# Altium PCB 100W_Inverter_V1_PCB.PcbDoc
Units mm, origin at the board's own origin, x right, y up, seen from the top; angles counter-clockwise.
Board outline 65.41 x 37.08 mm, 2 copper layers (Top Layer, Bottom Layer); 15 components, 15 nets, 48 pads, 0 vias.
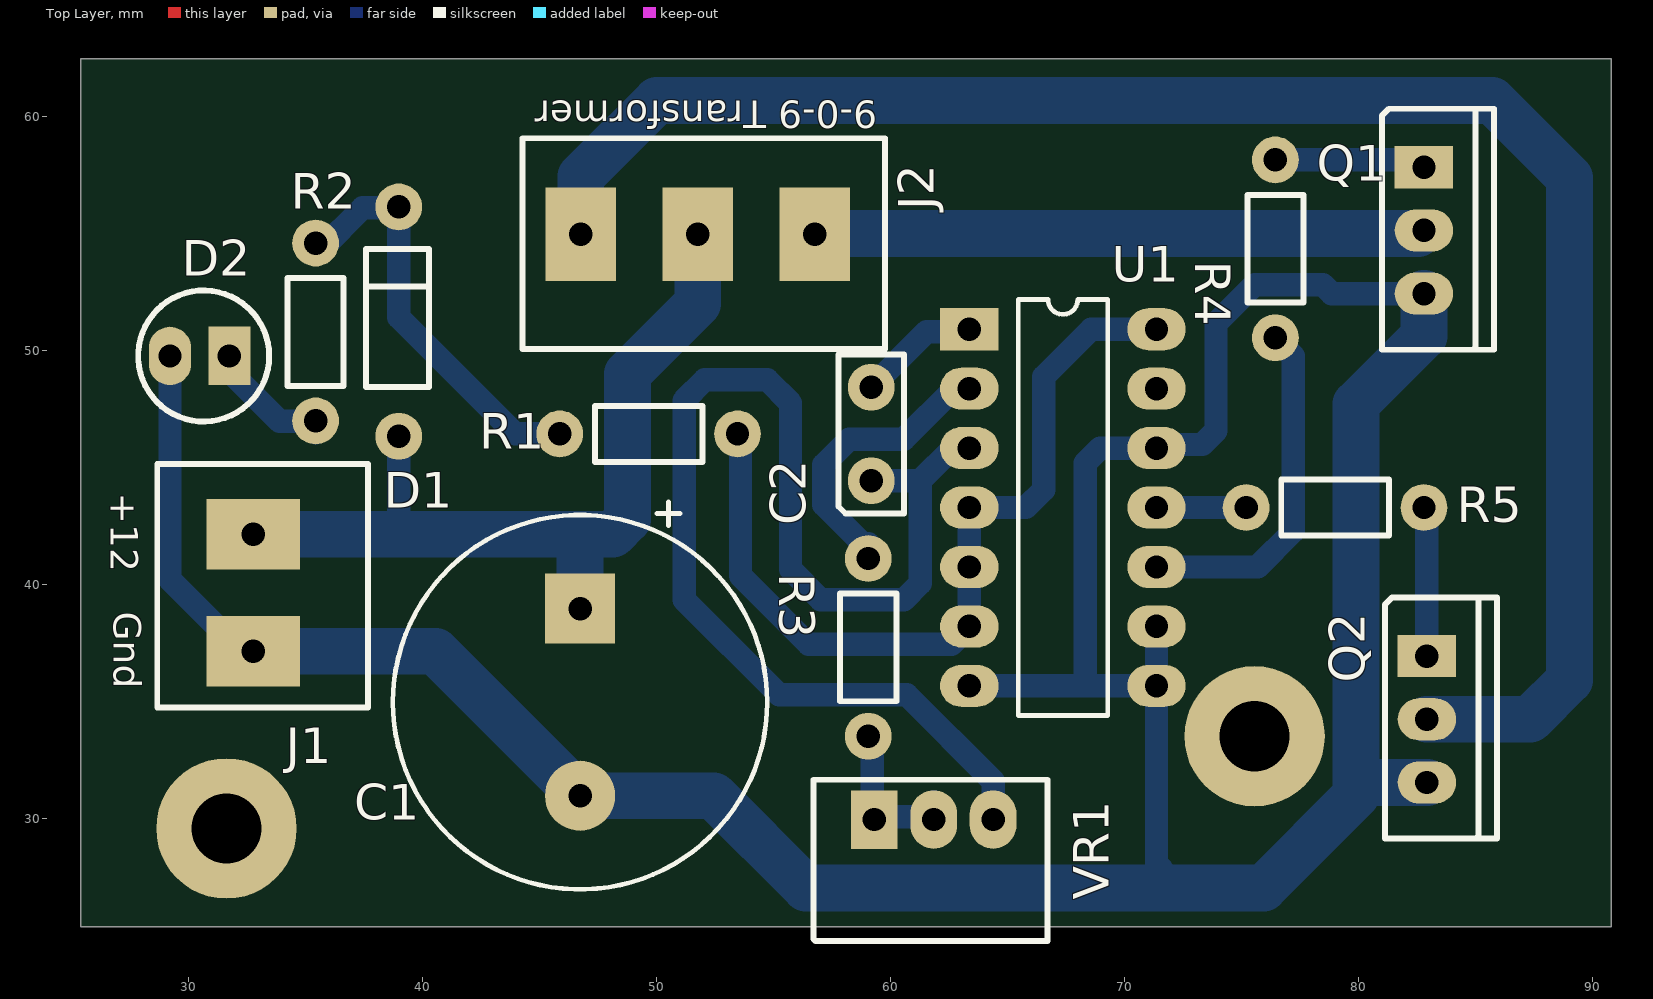
[diagram p0: Top Layer view]
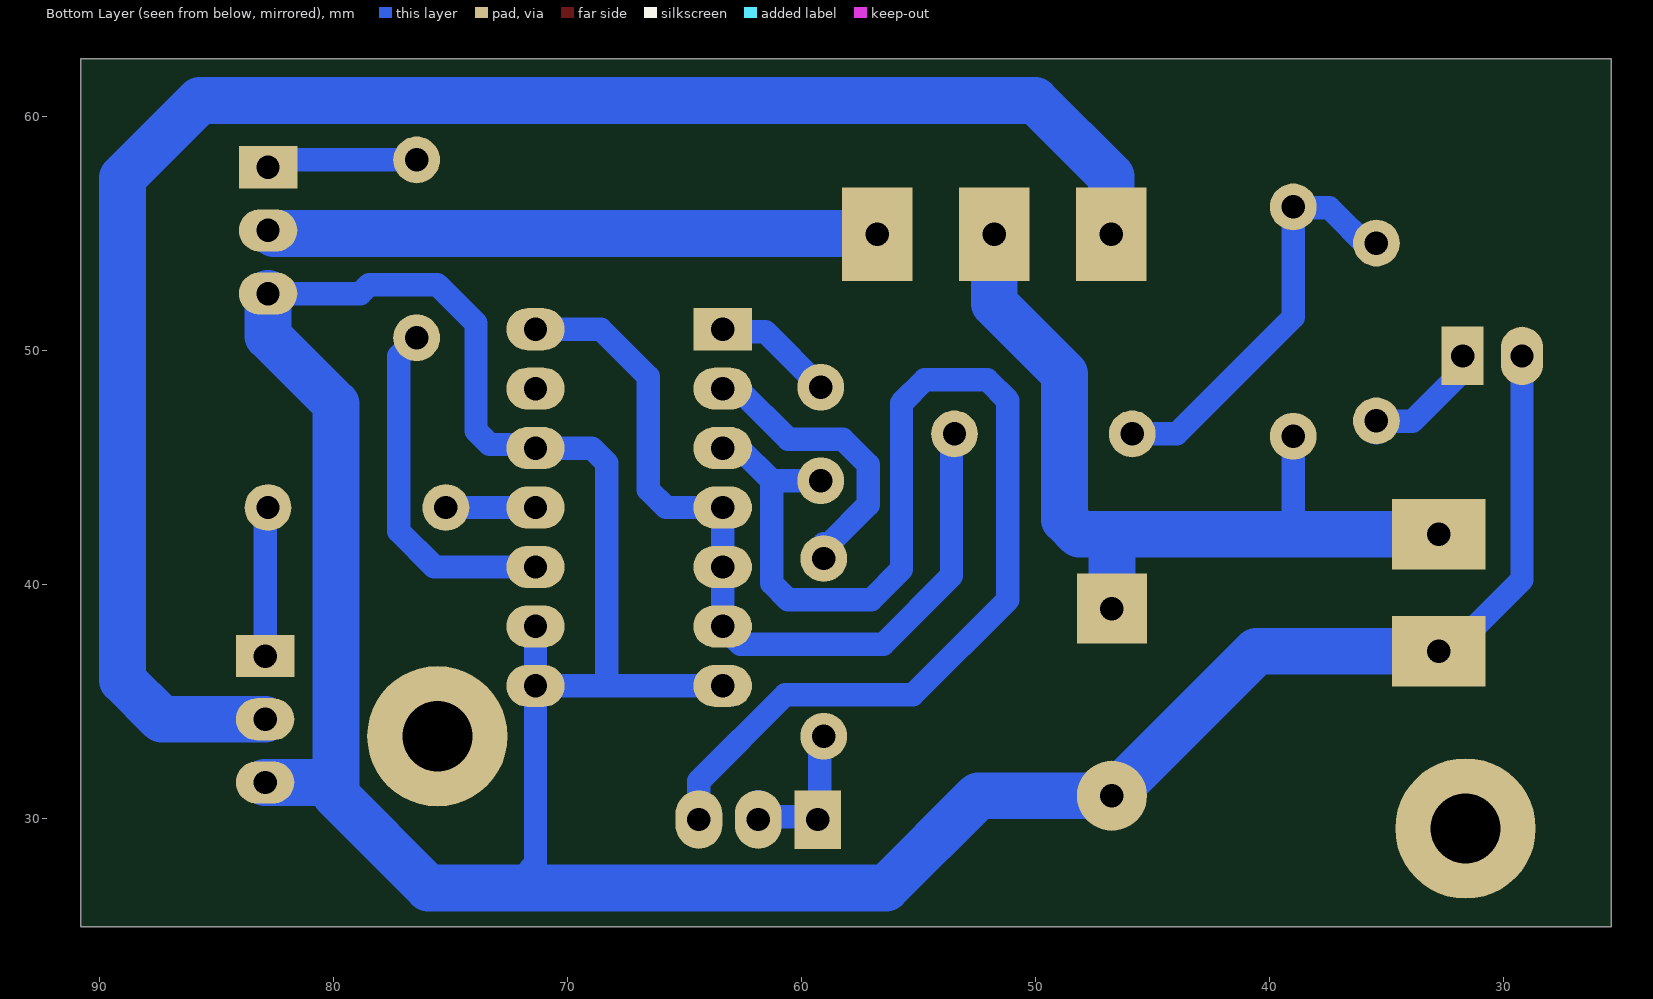
[diagram p1: Bottom Layer view, seen from below]
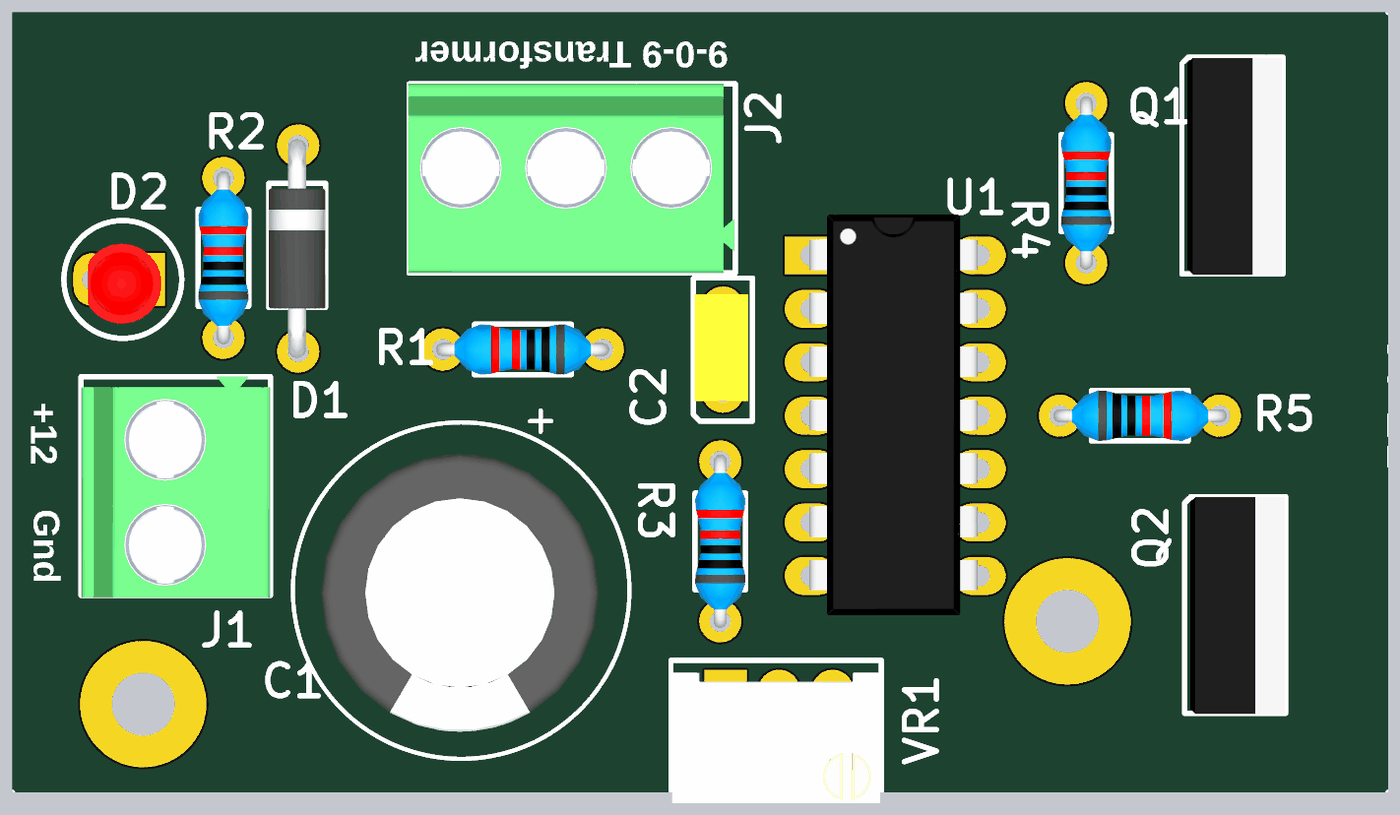
[diagram p2: 3D render of the assembled board from above, using the file's embedded part models]

## Layer stack, top to bottom
Top Solder: solder mask 0.0102, Solder Resist, Dk 3.5
Top Layer: signal copper 0.0356
Dielectric 1: dielectric 0.32, FR-4, Dk 4.8
Bottom Layer: signal copper 0.0356
Bottom Solder: solder mask 0.0102, Solder Resist, Dk 3.5

## Board outline
25.4,25.4 90.805,25.4 90.805,62.484 25.4,62.484

## Design rules (kind name [scope] priority, off if disabled: settings)
Clearance [All] p1: gap=0.02 ignorepadtopadclearanceinfootprint=FALSE
Height [All] p1: minheight=0 maxheight=30 prefheight=12.7
HoleSize [All] p1: absolutevalues=TRUE maxlimit=5 minlimit=0.025 maxpercent=80.000 minpercent=20.000
PolygonConnect [All] p1: connectstyle=Relief reliefconductorwidth=0.254 reliefentries=4 polygonreliefangle="90 Angle" airgapwidth=0.254
RoutingVias [All] p1: holewidth=0.711 width=1.27 viastyle="Through Hole" minholewidth=0.711 minwidth=1.27 maxholewidth=0.711 maxwidth=1.27
SolderMaskExpansion [All] p1: expansion=0.102
UnRoutedNet [All] p1: checkbadconnections=TRUE
Width [All] p1: maxlimit=3 minlimit=0.8 preferedwidth=1
27 further rules are at their usual default settings.

## Components (designator, comment, footprint, x,y, rotation, side; value= is the part's Value field where it differs from the comment)
C1 "C_2200uF_Ely_35V_TH" ECAP_8MMPITCH_16D 46.736,38.989 r270 top
C2 "C_0.01uF_Cer_50V_TH" 0.01UF_CER_TH 59.182,44.45 r90 top
D1 "1N4007" DIODE 38.989,46.355 r90 top
D2 "LED_3mm_Red_TH" LED_3MM_RED 31.75,49.784 r270 top
J1 "TB_2P_5mmP" TB_5MMP_2PIN 32.766,42.164 r0 top
J2 "TB_3P_5mmP" TB_5MMP_3PIN 56.769,54.991 r270 top
Q1 "IRF540" TO220 82.804,57.851 r0 top
Q2 "IRF540" TO220 82.931,36.957 r0 top
R1 "R_330_0.25W_TH" "AXIAL 0.3" 53.467,46.355 r180 top
R2 "R_1K_0.25W_TH" "AXIAL 0.3" 35.333,47.01 r90 top
R3 "390K" "AXIAL 0.3" 58.955,33.528 r90 top
R4 "R_220_0.25W_TH" "AXIAL 0.3" 76.354,50.566 r90 top
R5 "R_220_0.25W_TH" "AXIAL 0.3" 75.204,43.407 r0 top
U1 "CD4047BE" DIP14_8MMSPACE_2.54MMP 63.373,50.927 r0 top
VR1 "VR_1K_trim_20T" 3290H 59.309,29.972 r90 top

## Footprints (in the part's own frame and the unit in brackets; to place one, negate y for a bottom-side part, rotate by r counter-clockwise, add the part's x,y. Pads: shape width x height; smd on the part's side, far side on the other; paste and mask are expansions set on the pad)
0.01UF_CER_TH [mm]
  round 2 hole 1: 1(0,0) 2(4,0)
  silkscreen extent -1.4,-1.4 5.4,1.4, body extent -1.1,-1.2 5.3,1.35, height 6.08
3290H [mm]
  rect 2.5x2 hole 1: 1(0,0)
  oval 2.5x2 hole 1: 2(0,-2.54) 3(0,-5.08)
  silkscreen extent -5.2,-7.4 1.7,2.6, body extent -5.11,-7.35 1.11,2.56, height 11.81
"AXIAL 0.3" [mm]
  round 2 hole 1: 1(0,-0.1) 2(7.6,-0.1)
  silkscreen extent 1.5,-1.3 6.1,1.1, body extent -0.3,-1.3 7.92,1.1, height 3.2
DIODE [mm]
  round 2 hole 1: 1(0,0) 2(9.8,0)
  silkscreen extent 2.1,-1.3 8,1.4, body extent -0.29,-1.3 10.09,1.4, height 2.83
DIP14_8MMSPACE_2.54MMP [mm]
  rect 2.5x1.8 hole 1: 1(0,0)
  oval 2.5x1.8 hole 1: 2(0,-2.54) 3(0,-5.08) 4(0,-7.62) 5(0,-10.16) 6(0,-12.7) 7(0,-15.24) 8(8,-15.24) 9(8,-12.7) 10(8,-10.16) 11(8,-7.62) 12(8,-5.08) 13(8,-2.54) 14(8,0)
  silkscreen extent 2.08,-16.51 5.91,1.27, body extent -0.08,-17.11 7.92,1.93, height 4.01
ECAP_8MMPITCH_16D [mm]
  rect 3x3 hole 1: 1(0,0)
  round 3 hole 1: 2(8,0)
  silkscreen extent -4.57,-8 12,8, body extent -2.49,-6.66 10.71,6.54, height 26.4
LED_3MM_RED [mm]
  rect 2.5x1.8 hole 1: 1(0,0)
  oval 2.5x1.8 hole 1: 2(0,-2.54)
  silkscreen extent -2.8,-3.9 2.8,1.7, body extent -1.7,-2.75 2.1,0.75, height 6.5
TB_5MMP_2PIN [mm]
  rect 4x3 hole 1: 1(0,0) 2(0,-5)
  silkscreen extent -4.1,-7.4 4.9,3, body extent -4.1,-7.5 4.9,3, height 13.5
TB_5MMP_3PIN [mm]
  rect 4x3 hole 1: 1(0,0) 2(0,-5) 3(0,-10)
  silkscreen extent -4.1,-12.5 4.9,3, body extent -4.1,-12.55 4.9,2.95, height 13.5
TO220 [mm]
  rect 2.5x1.8 hole 1: 1(0,0)
  oval 2.5x1.8 hole 1: 2(0,-2.7) 3(0,-5.4)
  silkscreen extent -1.8,-7.8 3,2.5, body extent -1.54,-7.83 2.96,2.47, height 17.8

## Part data
C1: "Aluminum Electrolytic Capacitor, Polarized, Aluminum (wet), 35V, 20% +Tol, 20% -Tol, 2200uF, Through Hole Mount", Capacitance=2.2mF, Case/Package=Radial, Dielectric Material=Aluminium, ESR (Equivalent Series Resistance)=121mR, Manufacturer 1="CDE Illinois Capacitor", Manufacturer Part Number 1=228CKR035M, Max Operating Temperature=85°C, Min Operating Temperature=-40°C, Package Quantity=50, Ripple Current=2.09A, Tolerance=20%, Voltage Rating=35V, Category="Aluminum Electrolytic Capacitors", ComponentLink1Description=https://datasheet.ciiva.com/16819/ckr-cks-16819885.pdf?src-supplier=Future+Electronics, ComponentLink1URL=https://datasheet.ciiva.com/16819/ckr-cks-16819885.pdf?src-supplier=Future+Electronics, Diameter=16mm, Height=31.5mm, Height - Seated (Max)=1.24inch, Lead Free="Lead Free", Lead Pitch=0.295inch, Life (Hours)=2000Hour, Mount="Through Hole", Packaging=Bulk, Polarity=Polar, Pricing 1="1=1.52000, 10=1.20100, 50=1.04060, 100=0.90040, 500=0.68034, 1000=0.60030, 2500=0.56028, 5000=0.54027 (USD)", REACH SVHC="No SVHC", RoHS=Yes, Stock 1=3987, Supplier 1=Digi-Key, Voltage Rating (DC)=35V
C2: "Capacitor Ceramic 0.01uF 50V C0G 5% 5mm T/R", Capacitance=10nF, Case/Package=Radial, Manufacturer 1=TDK, Manufacturer Part Number 1=FA28NP01H103JNU06, Max Operating Temperature=150°C, Min Operating Temperature=-55°C, Ratings=AEC-Q200, Tolerance=5%, Voltage Rating=50V, Category="Ceramic Capacitors", ComponentLink1Description=https://product.tdk.com/info/en/catalog/datasheets/leadmlcc_halogenfree_fa150_en.pdf?src-supplier=Digi-Key, ComponentLink1URL=https://product.tdk.com/info/en/catalog/datasheets/leadmlcc_halogenfree_fa150_en.pdf?src-supplier=Digi-Key, Features="High Temperature", Height - Seated (Max)=0.217inch, Lead/Base Style=Kinked, Lead Pitch=0.197inch, Length=0.157inch, Mount="Through Hole", Packaging="Tape and Reel", Pricing 1="1=0.48000, 10=0.33700, 50=0.25500, 100=0.22220, 500=0.16456, 1000=0.13988 (USD)", RoHS=Yes, RoHS Compliant=Yes, Stock 1=2762, Supplier 1=Digi-Key, Width=0.098inch
D1: "Diode Switching 1KV 1A 2-Pin DO-41 T/R", Average Rectified Current=1A, Capacitance=8pF, Case/Package=DO-41, Forward Voltage=1V, Manufacturer 1=Diodes, Manufacturer Part Number 1=1N4007G-T, Max Operating Temperature=175°C, Max Repetitive Reverse Voltage (Vrrm)=1kV, Max Reverse Current=5uA, Max Surge Current=30A, Min Operating Temperature=-65°C, Package Quantity=5000, Category="Rectifier Diodes", ComponentLink1Description=https://datasheet.ciiva.com/36525/1537942-36525995.pdf?src-supplier=Jameco, ComponentLink1URL=https://datasheet.ciiva.com/36525/1537942-36525995.pdf?src-supplier=Jameco, ComponentLink2Description=https://datasheet.ciiva.com/15219/getdatasheetpartid-213960-15219547.pdf?src-supplier=Verical, ComponentLink2URL=https://datasheet.ciiva.com/15219/getdatasheetpartid-213960-15219547.pdf?src-supplier=Verical, ComponentLink3Description=https://datasheet.ciiva.com/25947/ds29002-25947029.pdf?src-supplier=Avnet+Europe, ComponentLink3URL=https://datasheet.ciiva.com/25947/ds29002-25947029.pdf?src-supplier=Avnet+Europe, ComponentLink4Description=https://datasheet.ciiva.com/912/ds29002-912230.pdf?src-supplier=Digi-Key, ComponentLink4URL=https://datasheet.ciiva.com/912/ds29002-912230.pdf?src-supplier=Digi-Key, ComponentLink5Description=https://datasheet.ciiva.com/16395/ds29002-16395514.pdf?src-supplier=Future+Electronics, ComponentLink5URL=https://datasheet.ciiva.com/16395/ds29002-16395514.pdf?src-supplier=Future+Electronics, Current Rating=1A, Element Configuration=Single, Forward Current=1A, Height=2.71mm, Lead Free="Lead Free", Length=4.7mm, Max Reverse Voltage (DC)=1kV, Mount="Through Hole", Number of Pins=2, Output Current=1A, Packaging="Tape and Reel", Peak Non-Repetitive Surge Current=30A, Polarity=Standard, Pricing 1="1=0.30000, 10=0.24800, 100=0.13170, 500=0.08662, 1000=0.05890, 2000=0.05313 (USD)", Radiation Hardening=No, Recovery Time=2us, Reverse Recovery Time=2us, Reverse Voltage (DC)=1kV, RoHS=Yes, RoHS Compliant=Yes, Series=-, Stock 1=144958, Supplier 1=Digi-Key, Voltage Rating (DC)=1kV, Weight=0.010582oz, Width=2.71mm
D2: Manufacturer 1=SunLED, Manufacturer Part Number 1=XLMDK34D, Category=LEDs, Pricing 1="1=0.38000, 10=0.30000, 100=0.13470, 500=0.12168, 1000=0.09996, 2000=0.08692, 5000=0.07823, 10000=0.06954, 25000=0.06519 (USD)", RoHS=No, Stock 1=8836, Supplier 1=Digi-Key
J1: "TERM BLOCK PLUG 2POS 90DEG 5MM", Color=Black, Current=15A, Manufacturer 1="On-Shore Technology", Manufacturer Part Number 1=OSTTH020100, Max Operating Temperature=115°C, Min Operating Temperature=-40°C, Voltage=300V, Category="Terminal Blocks", ComponentLink1Description=http://www.on-shore.com/wp-content/uploads/2015/09/ostthxx0160.pdf?src-supplier=Digi-Key, ComponentLink1URL=http://www.on-shore.com/wp-content/uploads/2015/09/ostthxx0160.pdf?src-supplier=Digi-Key, Contact Plating=Nickel, Mount="Free Hanging", Number of Levels=1, Number of Pins=2, Number of Positions=2, Number of Positions Per Level=2, Packaging=Bulk, Pitch=0.197inch, Pricing 1="1=0.86000, 10=0.53400, 25=0.45680, 50=0.41080, 100=0.40220, 250=0.34232, 500=0.32518, 1000=0.29096, 5000=0.22820 (USD)", RoHS=Yes, RoHS Compliant=No, Series=OSTTH, Stock 1=527, Supplier 1=Digi-Key, Termination=Screw, Wire Gauge (Max)=22AWG, Wire Gauge (Min)=14AWG
J2: "Res Thick Film 0603 100K Ohm 1% 0.1W(1/10W) ±100ppm/C Pad SMD Automotive T/R", Case/Package=0603, Case Code (Metric)=1608, Manufacturer 1=Panasonic, Manufacturer Part Number 1=ERJ3EKF1003V, Max Operating Temperature=155°C, Max Power Dissipation=100mW, Min Operating Temperature=-55°C, Package Quantity=5000, Resistance=100kR, Resistance Tolerance=1%, Resistor Type="Thick Film", Temperature Coefficient=100ppm/°C, Voltage Rating=75V, Case Code (Imperial)=0603, Category="Chip SMD Resistors", ComponentLink1Description=https://datasheet.ciiva.com/34303/1987476-34303566.pdf?src-supplier=Jameco, ComponentLink1URL=https://datasheet.ciiva.com/34303/1987476-34303566.pdf?src-supplier=Jameco, ComponentLink2Description=https://datasheet.ciiva.com/16770/70260748-16770253.pdf?src-supplier=Allied+Electronics, ComponentLink2URL=https://datasheet.ciiva.com/16770/70260748-16770253.pdf?src-supplier=Allied+Electronics, ComponentLink3Description=https://datasheet.ciiva.com/16740/aoa0000ce2-16740662.pdf?src-supplier=Future+Electronics, ComponentLink3URL=https://datasheet.ciiva.com/16740/aoa0000ce2-16740662.pdf?src-supplier=Future+Electronics, ComponentLink4Description=https://datasheet.ciiva.com/15158/getdatasheetpartid-247527-15158907.pdf?src-supplier=Verical, ComponentLink4URL=https://datasheet.ciiva.com/15158/getdatasheetpartid-247527-15158907.pdf?src-supplier=Verical, ComponentLink5Description=https://datasheet.ciiva.com/30133/aoa0000ce2-30133845.pdf?src-supplier=Onlinecomponents.com, ComponentLink5URL=https://datasheet.ciiva.com/30133/aoa0000ce2-30133845.pdf?src-supplier=Onlinecomponents.com, Construction=Rectangular, Contact Plating=Tin, Depth=0.8mm, Features="Automotive AEC-Q200", Height=0.022inch, Lead Free="Lead Free", Length=1.6mm, Military Standard=Not, Mount="Surface Mount", Number of Pins=2, Number of Terminations=2, Packaging="Tape and Reel", Power Rating=100mW, Pricing 1="1=0.10000, 10=0.03700, 100=0.01490, 1000=0.00670, 2500=0.00582 (USD)", Radiation Hardening=No, REACH SVHC="No SVHC", RoHS=Yes, RoHS Compliant=Yes, Series=ERJ, Size Code=0603, Stock 1=10082, Supplier 1=Digi-Key, Termination=SMD/SMT, Tolerance=1%, Voltage Rating (DC)=75V, Weight=7.1E-05oz, Width=0.8mm
Q1 Q2: "Mosfet, Power; N-ch; Vdss 100V; Rds(on) 21MILLIOHMS; Id 36A; TO-262; Pd 92W; Vgs +/-20", Case/Package=TO-262, Continuous Drain Current (ID)=36A, Drain to Source Breakdown Voltage=100V, Drain to Source Resistance=26.5mR, Gate to Source Voltage (Vgs)=20V, Input Capacitance=1.77nF, Manufacturer 1=Infineon, Manufacturer Part Number 1=IRF540ZLPBF, Max Operating Temperature=175°C, Max Power Dissipation=92W, Min Operating Temperature=-55°C, Category=MOSFETs, ComponentLink1Description=https://www.alliedelec.com/m/d/23899d70707f5ac9a5c306f9e15d4494.pdf?src-supplier=Allied+Electronics, ComponentLink1URL=https://www.alliedelec.com/m/d/23899d70707f5ac9a5c306f9e15d4494.pdf?src-supplier=Allied+Electronics, ComponentLink2Description=http://www.infineon.com/dgdl/irf540zpbf.pdf?fileId=5546d462533600a4015355e3af7d19a6&src-supplier=Digi-Key, ComponentLink2URL=http://www.infineon.com/dgdl/irf540zpbf.pdf?fileId=5546d462533600a4015355e3af7d19a6&src-supplier=Digi-Key, Drain to Source Voltage (Vdss)=100V, Halogen Free="Halogen Free", Height=0.38inch, Lead Free="Contains Lead", Length=0.42inch, Max Dual Supply Voltage=100V, Mount="Through Hole", Number of Pins=3, Packaging=Rail/Tube, Power Dissipation=92W, Rds On Max=26.5mR, RoHS=Yes, RoHS Compliant=Yes, Supplier 1=Newark, Turn-Off Delay Time=43ns, Turn-On Delay Time=15ns, Width=0.19inch
R1: "TE Connectivity CFR16 Series Axial Carbon Film Resistor 330 5% 0.25W -1200  0ppm/C", Case/Package=Conformal, Manufacturer 1="TE Connectivity", Manufacturer Part Number 1=CFR16J330RJIT, Max Operating Temperature=155°C, Min Operating Temperature=-55°C, Power Rating=250mW, Resistance=330R, Temperature Coefficient=0ppm/°C, Tolerance=5%, ComponentLink1Description=https://datasheet.ciiva.com/11823/0900766b80098b49-11823361.pdf?src-supplier=RSComponents, ComponentLink1URL=https://datasheet.ciiva.com/11823/0900766b80098b49-11823361.pdf?src-supplier=RSComponents, Diameter=1.85mm, Length=3.5mm, RoHS=Yes, Stock 1=1, Supplier 1=RSComponents, Termination=Axial
R2: "TE Connectivity CFR16 Series Axial Carbon Film Resistor 1k 5% 0.25W -1200  0ppm/C", Case/Package=Axial, Manufacturer 1="TE Connectivity", Manufacturer Part Number 1=CFR16J1K0, Max Operating Temperature=155°C, Max Power Dissipation=250mW, Min Operating Temperature=-55°C, Number of Resistors=1, Resistance=1kR, Resistance Tolerance=5%, Resistor Type="Thin Film", Temperature Coefficient=0ppm/°C, Voltage Rating=200V, Category="Through-Hole Resistors", ComponentLink1Description=https://datasheet.ciiva.com/11823/0900766b80098b49-11823166.pdf?src-supplier=RSComponents, ComponentLink1URL=https://datasheet.ciiva.com/11823/0900766b80098b49-11823166.pdf?src-supplier=RSComponents, ComponentLink2Description=https://datasheet.ciiva.com/24428/eng-ds-1773195-d-24428424.pdf?src-supplier=Onlinecomponents.com, ComponentLink2URL=https://datasheet.ciiva.com/24428/eng-ds-1773195-d-24428424.pdf?src-supplier=Onlinecomponents.com, ComponentLink3Description=https://datasheet.ciiva.com/22664/1723854-22664943.pdf?src-supplier=Element14, ComponentLink3URL=https://datasheet.ciiva.com/22664/1723854-22664943.pdf?src-supplier=Element14, Diameter=1.85mm, ELV=Compliant, Length=3.5mm, Mount=Axial, Number of Terminations=2, Packaging="Cut Tape", Power Rating=250mW, Pricing 1="1=0.10000, 10=0.07900, 25=0.05440, 50=0.04240, 100=0.03020, 250=0.02360, 500=0.01876, 1000=0.01331 (USD)", Radiation Hardening=No, REACH SVHC="No SVHC", RoHS=Yes, RoHS Compliant=Yes, Series="CFR16, Neohm", Stock 1=4940, Supplier 1=Digi-Key, Technology="CARBON FILM", Termination=Axial, Tolerance=5%, Voltage Rating (DC)=200V
R3: library part R_390K_0.25W_TH, "RES 390K OHM 1/4W 5% AXIAL", Case/Package=Axial, Manufacturer 1=Yageo, Manufacturer Part Number 1=CFR-25JB-52-390K, Max Operating Temperature=155°C, Max Power Dissipation=250mW, Min Operating Temperature=-55°C, Package Quantity=200, Resistance=390kR, Resistor Type="Carbon Film", Temperature Coefficient=-700ppm/°C, Tolerance=5%, Category="Through-Hole Resistors", ComponentLink1Description=https://datasheet.ciiva.com/2713/yageolr-cfr-2013-2713170.pdf?src-supplier=Digi-Key, ComponentLink1URL=https://datasheet.ciiva.com/2713/yageolr-cfr-2013-2713170.pdf?src-supplier=Digi-Key, Lead Free="Lead Free", Length=0.248inch, Number of Terminations=2, Packaging=Bulk, Pricing 1="1=0.10000, 10=0.06700, 25=0.04640, 50=0.03600, 100=0.02580, 250=0.02008, 500=0.01596, 1000=0.01133, 5000=0.00876 (USD)", RoHS=Yes, RoHS Compliant=Yes, Series=CFR, Stock 1=11679, Supplier 1=Digi-Key
R4 R5: "RES 220 OHM 1/4W 5% AXIAL", Case/Package=Conformal, Manufacturer 1="Stackpole Electronics", Manufacturer Part Number 1=CF14JT220R, Max Operating Temperature=155°C, Max Power Dissipation=250mW, Min Operating Temperature=-55°C, Package Quantity=1, Resistance=220R, Resistor Type="Carbon Film", Temperature Coefficient=-400ppm/°C, Tolerance=5%, Category="Through-Hole Resistors", ComponentLink1Description=https://www.seielect.com/catalog/SEI-Packaging.pdf?src-supplier=Digi-Key, ComponentLink1URL=https://www.seielect.com/catalog/SEI-Packaging.pdf?src-supplier=Digi-Key, ComponentLink2Description=https://www.seielect.com/catalog/SEI-CF_CFM.pdf?src-supplier=Avnet, ComponentLink2URL=https://www.seielect.com/catalog/SEI-CF_CFM.pdf?src-supplier=Avnet, ComponentLink3Description=https://www.verical.com/server-webapp/html/getDatasheet?partID=375100&src-supplier=Verical, ComponentLink3URL=https://www.verical.com/server-webapp/html/getDatasheet?partID=375100&src-supplier=Verical, ComponentLink4Description=http://components.arrow.com/part/dataview/44988614S316465N1174?src-supplier=Arrow+Electronics, ComponentLink4URL=http://components.arrow.com/part/dataview/44988614S316465N1174?src-supplier=Arrow+Electronics, Construction=Cylindrical, Contact Plating=Tin,Matte, Diameter=2.3mm, Features="Flame Retardant Coating", Lead Free="Lead Free", Length=6.5mm, Military Standard=Not, Mount="Through Hole,Axial", Number of Terminations=2, Packaging="Tape and Reel", Power Rating=250mW, Pricing 1="1=0.10000, 10=0.03600, 25=0.02640, 50=0.02000, 100=0.01480, 250=0.01124, 500=0.00900, 1000=0.00662 (USD)", Radiation Hardening=No, RoHS=Yes, RoHS Compliant=Yes, Series=CF, Stock 1=142794, Supplier 1=Digi-Key, Termination=Axial
U1: "MONO/ASTABLE MULTIVIBRATOR, 125NS, DIP-14; Multivibrator Type:Monostable / Astable; Output Current:6.8A; Supply Voltage Min:3V; Supply Voltage Max:18V; Logic Case Style:DIP; No. of Pins:14; Propagation Delay:125ns; Packaging:Each ;RoHS Compliant: Yes", Case/Package=DIP, High Level Output Current=-4.2mA, Input Capacitance=5pF, Low Level Output Current=4.2mA, Manufacturer 1="Texas Instruments", Max Operating Temperature=125°C, Max Power Dissipation=500mW, Max Supply Current=20uA, Max Supply Voltage=18V, Min Operating Temperature=-55°C, Min Supply Voltage=3V, Operating Supply Voltage=12V, Output Current=6.8mA, Package Quantity=25, Category="Logic ICs", ComponentLink1Description=https://datasheet.ciiva.com/14134/cd4047b-eng-tds-14134622.pdf?src-supplier=Distrelec, ComponentLink1URL=https://datasheet.ciiva.com/14134/cd4047b-eng-tds-14134622.pdf?src-supplier=Distrelec, ComponentLink2Description=https://datasheet.ciiva.com/27050/894331-27050683.pdf?src-supplier=Jameco, ComponentLink2URL=https://datasheet.ciiva.com/27050/894331-27050683.pdf?src-supplier=Jameco, ComponentLink3Description=https://datasheet.ciiva.com/15095/getdatasheetpartid-72002-15095147.pdf?src-supplier=Verical, ComponentLink3URL=https://datasheet.ciiva.com/15095/getdatasheetpartid-72002-15095147.pdf?src-supplier=Verical, ComponentLink4Description=https://datasheet.ciiva.com/41455/001015487-da-01-en-ic-mono-astbl-multi-cd4047be-pdip-14-tid-41455405.pdf?src-supplier=Conrad, ComponentLink4URL=https://datasheet.ciiva.com/41455/001015487-da-01-en-ic-mono-astbl-multi-cd4047be-pdip-14-tid-41455405.pdf?src-supplier=Conrad, ComponentLink5Description=https://datasheet.ciiva.com/29297/173223-da-01-en-c-mos-ic-cd-4047-be-dip14-tid-29297339.pdf?src-supplier=Conrad, ComponentLink5URL=https://datasheet.ciiva.com/29297/173223-da-01-en-c-mos-ic-cd-4047-be-dip14-tid-29297339.pdf?src-supplier=Conrad, ComponentLink6Description=https://datasheet.ciiva.com/1509/1830980-1509169.pdf?src-supplier=Element14, ComponentLink6URL=https://datasheet.ciiva.com/1509/1830980-1509169.pdf?src-supplier=Element14, ComponentLink7Description=https://datasheet.ciiva.com/1885/cd4047b-1885142.pdf?src-supplier=Digi-Key, ComponentLink7URL=https://datasheet.ciiva.com/1885/cd4047b-1885142.pdf?src-supplier=Digi-Key, ComponentLink8Description=https://datasheet.ciiva.com/3305/cd4047b-3305349.pdf?src-supplier=Avnet, ComponentLink8URL=https://datasheet.ciiva.com/3305/cd4047b-3305349.pdf?src-supplier=Avnet, ComponentLink9Description=https://datasheet.ciiva.com/26242/cd4047b-26242053.pdf?src-supplier=Avnet+Europe, ComponentLink9URL=https://datasheet.ciiva.com/26242/cd4047b-26242053.pdf?src-supplier=Avnet+Europe, Contact Plating=Gold, Height=4.57mm, Independent Circuits=1, Lead Free="Lead Free", Length=19.3mm, Logic Function=Multivibrator, Manufacturer Part Number 1=CD4047BE, Mount="Through Hole", Number of Bits=1, Number of Circuits=1, Number of Elements=1, Number of Pins=14, Packaging=Rail/Tube, Power Dissipation=500mW, Pricing 1="1=0.74000, 10=0.64700, 25=0.60800, 100=0.49610, 250=0.46084, 500=0.39220, 1000=0.32375 (USD)", Propagation Delay=125ns, Quiescent Current=20uA, Radiation Hardening=No, REACH SVHC="No SVHC", RoHS=Yes, Schmitt Trigger Input=No, Stock 1=162, Supplier 1=Digi-Key, Turn-On Delay Time=300ns, Weight=0.032734oz, Width=6.35mm
VR1: "TRIMMER 1K OHM 1W PC PIN", Manufacturer 1=Bourns, Manufacturer Part Number 1=3290H-1-102M, Max Operating Temperature=150°C, Max Power Dissipation=1W, Min Operating Temperature=-65°C, Package Quantity=50, Resistance=1kR, Resistor Type=Wirewound, Temperature Coefficient=50ppm/°C, Tolerance=5%, Category="Variable Resistors and Potentiometers", ComponentLink1Description=https://datasheet.ciiva.com/2165/3290-2165858.pdf?src-supplier=Digi-Key, ComponentLink1URL=https://datasheet.ciiva.com/2165/3290-2165858.pdf?src-supplier=Digi-Key, ComponentLink2Description=https://datasheet.ciiva.com/16813/3290-16813453.pdf?src-supplier=Avnet+Europe, ComponentLink2URL=https://datasheet.ciiva.com/16813/3290-16813453.pdf?src-supplier=Avnet+Europe, Contact Plating=Gold, Depth=6.1mm, Height=0.375inch, Length=17.78mm, Military Standard=Not, Mount="PCB,Through Hole,Panel", Number of Turns=25, Packaging=Rail/Tube, Power Rating=1W, Pricing 1="50=38.65400 (USD)", RoHS=Yes, RoHS Compliant=Yes, Series="Trimpot® 3290 - Sealed", Supplier 1=Digi-Key, Taper=Linear, Termination=Pin, Weight=0.025oz

## Free pads (board coordinates)
  round 6 hole 3: ""(31.623,29.591) ""(75.565,33.528)

## Nets (pads, with @x,y where several pads share a name; then routed paths per layer and width w, separated by ;. In a path a pad name is that pad's centre, name@x,y a point inside that pad or via, vN(x,y) a via of type N, cw(c..) or ccw(c..) an arc to the next point about the centre after c; other vN are vias at no path point)
+12: C1.1 D1.1 J1.1 J2.2 | length 37.1
  Bottom Layer w1: 38.989,42.164 D1.1
  Bottom Layer w2: J1.1 38.989,42.164 46.736,42.164 ; C1.1 46.736,42.164 ; J2.2 51.769,52.023 48.768,49.022 48.768,42.799 48.133,42.164 46.736,42.164
+12_Driver: D1.2 R1.2 R2.2 | length 17.7
  Bottom Layer w1: R2.2@35.687,54.356 37.448,56.117 38.951,56.117 D1.2 38.989,51.435 43.969,46.455 R1.2
GND: C1.2 D2.2 J1.2 Q1.3 Q2.3 U1.7 U1.8 U1.9 U1.12 | length 141.6
  Bottom Layer w1: D2.2 29.21,40.22 32.266,37.164 J1.2 ; U1.7 68.199,35.687 ; U1.9 U1.8 ; 71.628,27.813 71.373,28.068 U1.8 ; Q1.3 78.867,52.451 78.486,52.832 75.565,52.832 73.914,51.181 73.914,46.586 73.328,46 71.526,46 U1.12 68.961,45.847 68.326,45.212 68.326,35.814 68.199,35.687 ; 68.199,35.687 U1.8
  Bottom Layer w2: J1.2 40.561,37.164 C1.2 52.45,30.989 56.388,27.051 75.946,27.051 79.902,31.007 79.902,31.557 ; Q1.3 82.804,50.635 79.902,47.733 79.902,31.557 ; Q2.3 79.902,31.557
NetC2_1: C2.1 U1.3 VR1.3 | length 54.6
  Bottom Layer w1: C2.1 59.192,44.46 61.282,44.46 ; U1.3 62.669,45.847 61.282,44.46 ; VR1.3 64.389,31.619 60.702,35.306 55.245,35.306 51.181,39.37 51.181,47.879 52.07,48.768 54.737,48.768 55.729,47.776 55.729,40.664 57.023,39.37 60.579,39.37 61.282,40.073 61.282,44.46
NetC2_2: C2.2 U1.1 | length 5.2
  Bottom Layer w1: C2.2 61.559,50.827 63.273,50.827 U1.1
NetD2_1: D2.1 R2.1 | length 5.4
  Bottom Layer w1: D2.1 31.75,49.134 33.894,46.99 34.945,46.99 R2.1@35.433,46.502
NetJ2_1: J2.1 Q1.2 | length 25.8
  Bottom Layer w1: J2.1 J2.1@56.802,55.024
  Bottom Layer w2: J2.1@56.802,55.024 Q1.2@82.55,55.024
NetJ2_3: J2.3 Q2.2 | length 75.7
  Bottom Layer w2: J2.3 46.769,57.453 50.022,60.706 85.725,60.706 89.027,57.404 89.027,35.941 87.343,34.257 Q2.2
NetQ1_1: Q1.1 R4.2 | length 6.5
  Bottom Layer w1: R4.2 81.939,58.166 82.254,57.851 Q1.1
NetQ2_1: Q2.1 R5.2 | length 6.2
  Bottom Layer w1: Q2.1 R5.2@82.931,43.18
NetR1_1: R1.1 U1.4 U1.5 U1.6 U1.14 | length 36.4
  Bottom Layer w1: R1.1@53.594,46.455 53.594,40.386 56.515,37.465 62.611,37.465 U1.6 U1.5 U1.4 65.786,43.307 66.548,44.069 66.548,48.895 68.58,50.927 U1.14
NetR3_1: R3.1 VR1.1 VR1.2 | length 5.9
  Bottom Layer w1: R3.1@59.182,33.167 59.22,33.129 59.22,30.823 59.944,30.099 61.849,30.099 VR1.2@61.849,30.734
NetR3_2: R3.2 U1.2 | length 11.9
  Bottom Layer w1: R3.2@59.055,41.763 58.821,41.763 57.15,43.434 57.15,45.134 58.244,46.228 60.564,46.228 62.723,48.387 U1.2
"Q Output": R4.1 U1.10 | length 15.1
  Bottom Layer w1: U1.10 75.692,40.767 77.216,42.291 77.216,49.784 76.454,50.546 R4.1
"Q\ Output": R5.1 U1.11 | length 4
  Bottom Layer w1: U1.11 R5.1 R5.1@75.331,43.18
pads on no net: U1.13

## Polygon pours and split planes (outlines as drawn)
no net on Bottom Layer "Bottom Layer-No Net" (solid, pour order 4): 62.23,44.196

## Silkscreen, mask and mechanical layers (free items; w line width, h text height)
Top Overlay:
  text "9-0-9 Transformer" at 59.436,61.087 h2 r180
  text "+12" at 26.289,43.942 h2 r270
  text "Gnd" at 26.416,38.862 h2 r270

## Dimensions
90.805,25.4 to 90.805,62.484 on Top Overlay
25.4,25.4 to 90.805,25.4 on Top Overlay